# Altium PCB 1229-T1.PcbDoc
Units mm, origin at the board's own origin, x right, y up, seen from the top; angles counter-clockwise.
Board outline 28.78 x 9.58 mm, 4 copper layers (TopLayer, MidLayer1, MidLayer14, BottomLayer); 42 components, 33 nets, 118 pads, 49 vias.
Unrouted connection lines stored in the file: 24.
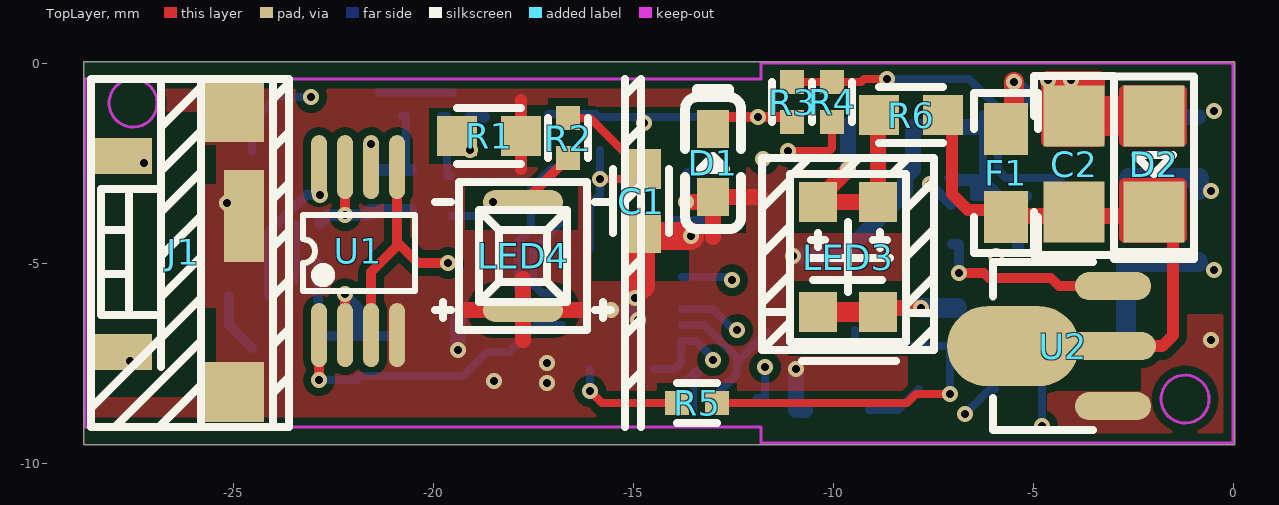
[diagram p0: TopLayer view]
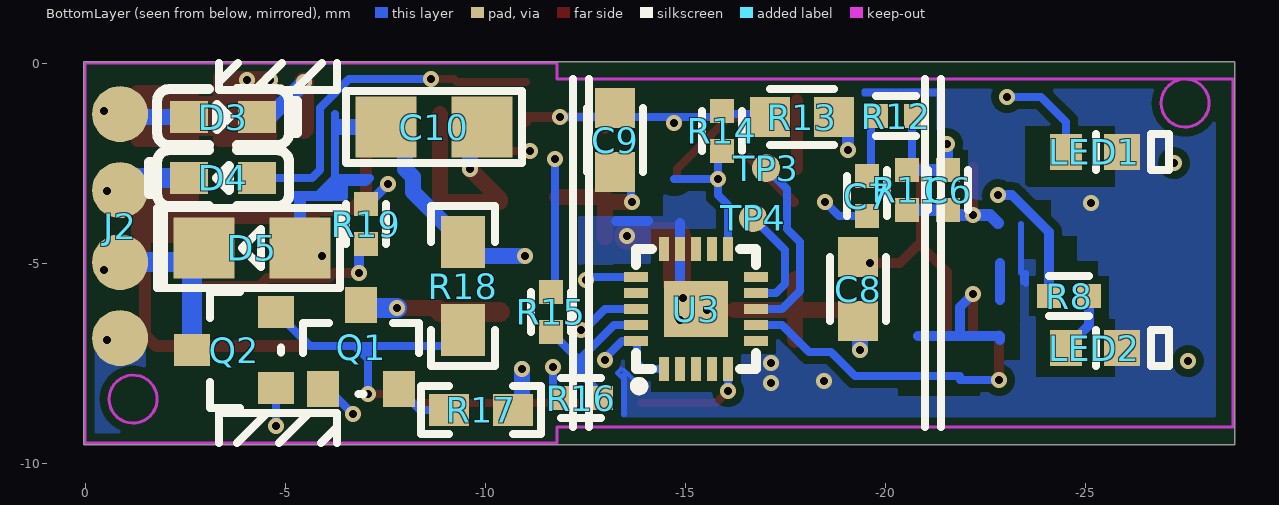
[diagram p1: BottomLayer view, seen from below]
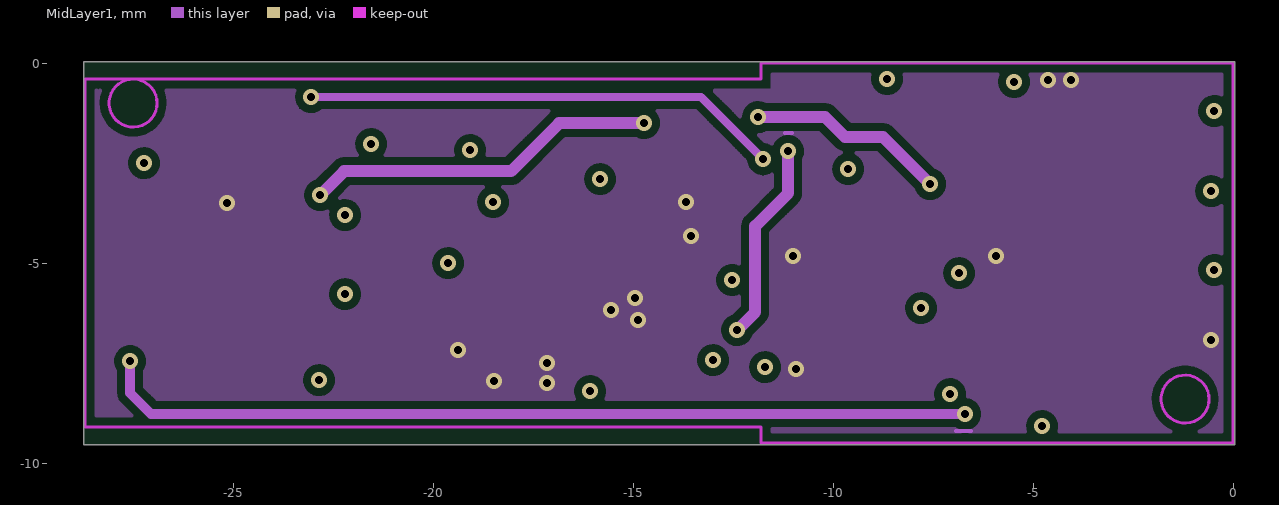
[diagram p2: MidLayer1]
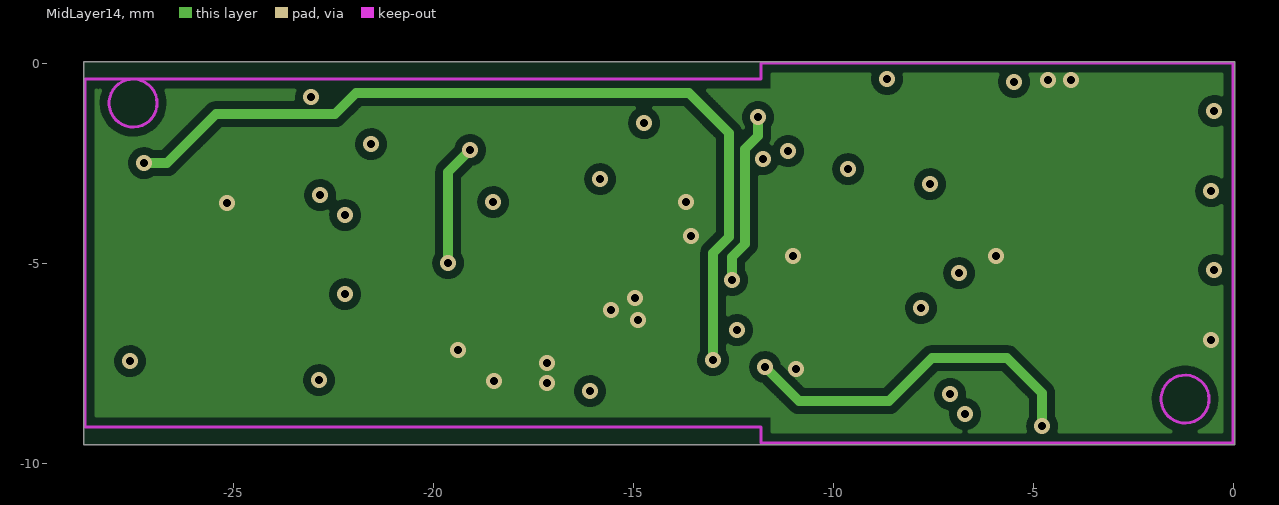
[diagram p3: MidLayer14]

## Layer stack, top to bottom
TopSolder: solder mask 0.0102, Solder Resist, Dk 3.5
TopLayer: signal copper 0.0356
Dielectric1: dielectric 0.32, FR-4, Dk 4.8
MidLayer1: signal copper 0.0356
Dielectric2: dielectric 0.32, FR-4, Dk 4.8
MidLayer14: signal copper 0.0356
Dielectric3: dielectric 0.32, FR-4, Dk 4.8
BottomLayer: signal copper 0.0356
BottomSolder: solder mask 0.0102, Solder Resist, Dk 3.5

## Board outline
-28.738,-9.538 0.038,-9.538 0.038,0.038 -28.738,0.038

## Design rules (kind name [scope] priority, off if disabled: settings)
Clearance [All] p1: gap=0.15 ignorepadtopadclearanceinfootprint=FALSE except(0: Arc-Hole Track-Hole SMDPad-Hole THPad-Hole Via-Hole Fill-Hole Poly-Hole Region-Hole Text-Hole)
ComponentClearance [All] p1 off: gap=0.254 collisioncheckmode=3 verticalgap=0.254 showdistances=FALSE
FabricationTestPointUsage TestPointUsage [All] p1: valid=0 allowmultiple=FALSE
FabricationTestpoint Testpoint [All] p1: side=3 testpointundercomponent=TRUE minsize=1.016 maxsize=2.54 preferedsize=1.524 minholesize=0.508 maxholesize=1.016 preferedholesize=0.813 testpointgrid=0.025 allowsidetop=TRUE allowsidebottom=TRUE usegrid=TRUE gridtolerance=0
PolygonConnect [All] p1: connectstyle=Relief reliefconductorwidth=0.254 reliefentries=4 polygonreliefangle="90 Angle" airgapwidth=0.254
RoutingLayers [All] p1: top layer_v5=TRUE mid layer 1_v5=FALSE mid layer 14_v5=FALSE bottom layer_v5=TRUE
RoutingVias [All] p1: holewidth=0.711 width=1.27 viastyle="Through Hole" minholewidth=0.711 minwidth=1.27 maxholewidth=0.711 maxwidth=1.27
SolderMaskExpansion [All] p1: expansion=0.051 istentingtop=FALSE
Width [All] p1: maxlimit=0.254 minlimit=0.254 preferedwidth=0.254
26 further rules are at their usual default settings.

## Components (designator, comment, footprint, x,y, rotation, side; value= is the part's Value field where it differs from the comment)
C1 "10uF" 0603#1 -14.8,-4.25 r90 top
C2 "2uF" 1206#1 -3.975,-3.725 r90 top
C6 "3.9PF" 0402#1 -21.575,-3.675 r90 bottom
C7 "470PF" 0402#1 -19.55,-3.825 r90 bottom
C8 "100nF" 0603#1 -19.325,-4.85 r270 bottom
C9 "10uF" 0603#1 -13.25,-1.125 r270 bottom
C10 "1uF" 1206#2 -7.525,-1.6 r0 bottom
D1 "C2" 0805#1 -13,-3.35 r0 top
D2 "CG" 1206#1 -1.975,-1.325 r270 top
D3 "W2" 0805#1 -2.6,-1.35 r270 bottom
D4 "W2" 0805#1 -4.3,-2.875 r90 bottom
D5 "CM" 1206#2 -5.375,-4.625 r180 bottom
F1 "V" 0805#2 -5.675,-3.85 r90 top
J1 "小板" SIP5P -24.975,-1.225 r0 top
J2 "" SIP4 -0.875,-6.875 r90 bottom
LED1 "红色LED" 0603V#1 -24.525,-2.225 r0 bottom
LED2 "黄色LED" 0603V#1 -24.525,-7.125 r0 bottom
LED3 "3528 红色LED" LED-SMD -8.875,-3.475 r0 top
LED4 "" LED2P -17.75,-6.175 r0 top
Q1 "AJR A" SOT-23#1 -5.95,-8.15 r0 bottom
Q2 "AJR" SOT-23#2 -4.775,-8.125 r90 bottom
R1 "10K/103" 0603#1 -19.4,-1.825 r0 top
R2 "412K" 0402#1 -16.625,-2.375 r90 top
R3 "10K" 0402#1 -11.025,-1.475 r90 top
R4 "665R" 0402#1 -10.025,-1.475 r90 top
R5 "4.7K" 0402#1 -12.9,-8.5 r180 top
R6 "10R/100" 0603#1 -8.85,-1.3 r0 top
R8 "2.2K" 0402#2 -24.1,-5.825 r0 bottom
R11 "420K" 0402#1 -20.55,-3.675 r90 bottom
R12 "10K" 0402#2 -19.775,-1.325 r0 bottom
R13 "10K" 0603#2 -18.725,-1.35 r180 bottom
R14 "10K" 0402#1 -15.925,-2.2 r90 bottom
R15 "4.7K" 0402#1 -11.65,-6.725 r90 bottom
R16 "2K" 0402#2 -11.9,-8.375 r0 bottom
R17 "5.6R/5R6" 0603V#2 -9.1,-8.675 r0 bottom
R18 "3.9R/3R9" 0805#2 -9.45,-6.675 r90 bottom
R19 "10R" 0402#1 -7.025,-4.525 r90 bottom
TP3 "" SIP1 -17.025,-2.625 r90 bottom
TP4 "" SIP1 -16.7,-3.875 r90 bottom
U1 "GS358" SOP-8A -22.85,-6.8 r0 top
U2 "7550-1" SOT89 -3,-5.575 r0 top
U3 "???" QFN20 -14.475,-7.65 r180 bottom

## Footprints (in the part's own frame and the unit in brackets; to place one, negate y for a bottom-side part, rotate by r counter-clockwise, add the part's x,y. Pads: shape width x height; smd on the part's side, far side on the other; paste and mask are expansions set on the pad)
0402#1 [mm]
  rect 0.6x0.6 smd: 1(0,0) 2(1,0)
  silkscreen extent 0,-0.5 1,0.5
0402#2 [mm]
  rect 0.6x0.6 smd: 1(0,0) 2(-1,0)
  silkscreen extent -1,-0.5 0,0.5
0603#1 [mm]
  rect 1x1 smd: 1(0,0) 2(1.6,0)
  silkscreen extent 0,-0.7 1.6,0.7
0603#2 [mm]
  rect 1x1 smd: 1(0,0) 2(-1.6,0)
  silkscreen extent -1.6,-0.7 0,0.7
0603V#1 [mm]
  rect 0.8x0.9 smd: 1(0,0)
  rect 0.9x0.9 smd: 2(-1.4,0)
  silkscreen extent -2.58,-0.45 -0.75,0.45
0603V#2 [mm]
  rect 1x0.8 smd: 1(0,0) 2(-1.6,0)
  silkscreen extent -2.3,-0.6 0.7,0.6
0805#1 [mm]
  rect 0.8x0.95 smd: 1(0,0) 2(0,1.7)
  silkscreen extent -0.7,-0.8 0.7,2.7
0805#2 [mm]
  rect 1.3x1.1 smd: 1(0,0) 2(2.2,0)
  silkscreen extent -0.9,-0.8 3.1,0.8
1206#1 [mil]
  rect 60x60 smd: 1(0,0) 2(94.49,0)
  silkscreen extent -42,-39 134,39
1206#2 [mil]
  rect 60x60 smd: 1(0,0) 2(-94.49,0)
  silkscreen extent -134,-35 39,35
LED2P [mm]
  oval 2x0.6 smd: 1(0,0) 2(0,2.7)
  silkscreen extent -2.2,-0.5 2.2,3.2
LED-SMD [mm]
  rect 0.95x1 smd: 1(0,0) 2(-1.5,0) 3(-1.5,-2.75) 4(0,-2.75)
  silkscreen extent -2.9,-3.98 1.4,1.1
QFN20 [mm]
  rect 0.25x0.6 smd: 1(0,0) 2(0.4,0) 3(0.8,0) 4(1.2,0) 5(1.6,0) 11(1.6,3) 12(1.2,3) 13(0.8,3) 14(0.4,3) 15(0,3)
  rect 0.6x0.25 smd: 6(2.3,0.7) 7(2.3,1.1) 8(2.3,1.5) 9(2.3,1.9) 10(2.3,2.3) 16(-0.7,2.3) 17(-0.7,1.9) 18(-0.7,1.5) 19(-0.7,1.1) 20(-0.7,0.7)
  rect 1.6x1.4 smd: 21(0.8,1.5)
  silkscreen extent -0.7,-0.5 2.3,3
SIP1 [mm]
  round 0.7 smd: 1(0,0)
SIP4 [mm]
  round 1.4 smd: 1(0,0) 2(1.9,0) 3(3.7,0) 4(5.6,0)
SIP5P [mm]
  rect 1.5x1.5 smd: 1(0,0) 3(0,-7)
  rect 1x2.3 smd: 2(0.25,-2.6)
  rect 1.5x0.9 smd: 4(-2.8,-1.1) 5(-2.8,-6)
  silkscreen extent -3.57,-7.88 1.38,0.82
SOP-8A [mm]
  oval 0.4x1.6 smd: 1(0,0) 2(0.65,0) 3(1.3,0) 4(1.95,0) 5(1.95,4.2) 6(1.3,4.2) 7(0.65,4.2) 8(0,4.2)
  silkscreen extent -0.4,1.1 2.4,3
SOT89 [mm]
  oval 3.3x2 smd: 0(-2.5,-1.5)
  oval 1.9x0.7 smd: 1(0,0) 3(0,-3)
  oval 2.54x0.7 smd: 2(-0.2,-1.5)
  silkscreen extent -3,-3.6 -0.5,0.6
SOT-23#1 [mm]
  rect 0.8x0.9 smd: 1(0,0) 2(-1.9,0) 3(-0.95,-2.1)
  silkscreen extent -2.4,-1.65 0.5,0.13
SOT-23#2 [mm]
  rect 0.8x0.9 smd: 1(0,0) 2(1.9,0) 3(0.95,2.1)
  silkscreen extent -0.5,-0.13 2.4,1.65

## Part data
C1 C2 C6 C7 C8 C9 C10: library part "CAP NP", Text Field1=20, Text Field2=10
D1 D2 D3 D4 D5: library part D1N3063_0, Text Field1=20, Text Field2=20
F1: library part FUSE_0, Text Field1=30, Text Field2=20
J1: library part "HEADER 10_0", Text Field1=30, Text Field2=40
J2: library part "HEADER 1_0", Text Field1=30, Text Field2=50
LED1 LED2 LED4: library part LED, Text Field1=40, Text Field2=20
LED3: library part "LED BI-COLOUR_0", Text Field1=60, Text Field2=40
Q1 Q2: library part Q2N2369_0, Text Field1=20, Text Field2=20
R1 R2 R3 R4 R5 R6 R8 R11 R12 R13 R14 R15 R16 R17 R18 R19: library part R, Text Field1=20, Text Field2=30
TP3 TP4: library part "T POINT R", Text Field1=10, Text Field2=20
U1: library part LM358
U2: library part 78XX/SM_1, Text Field1=70, Text Field2=30
U3: library part 20P

## Via types
v1: diameter 0.4, hole 0.2, TopLayer to BottomLayer, 49 vias

## Nets (pads, with @x,y where several pads share a name; then routed paths per layer and width w, separated by ;. In a path a pad name is that pad's centre, name@x,y a point inside that pad or via, vN(x,y) a via of type N, cw(c..) or ccw(c..) an arc to the next point about the centre after c; other vN are vias at no path point)
GND: C1.1 C2.2 C8.2 C9.2 C10.1 D1.1 D2.1 D5.1 J1.1 J1.2 J1.3 J2.1 LED1.2 LED2.2 LED4.1 R1.2 R17.2 R18.2 U1.4 U2.3 U3.14 | length 45.2
  TopLayer w0.3: -17.8,-2.65 -17.8,-0.925 ; C2.2@-4.65,-1.95 -3.35,-1.95 -3.35,-0.35 -4.65,-0.35 C2.2@-4.65,-1.95 ; D2.1@-2.7,-1.95 -1.3,-1.95 -1.3,-0.7 -2.7,-0.7 D2.1@-2.7,-1.95
  TopLayer w0.4: -19.175,-6.175 -16.225,-6.175 ; -17.75,-6.925 -17.75,-5.4 ; v1(-13.675,-3.475) -13,-3.475 -13,-4.35 D1.1 -11.8,-3.35
  TopLayer w1: C2.2@-4.2,-0.75 -4.2,-1.4 -3.825,-1.4 C2.2@-3.825,-0.8 ; C2.2@-3.95,-1.325 -1.75,-1.325 -1.75,-1.125 -1.75,-1.5 D2.1@-2.225,-1.5
  BottomLayer w0.2: v1@-13.65,-3.475 -13.65,-2.725 C9.2 ; -6.25,-2.875 -6.475,-2.875 -7.025,-2.875 -7.125,-2.875 -7.025,-2.975 -6.475,-2.975 -6.475,-3.175 -6.475,-3.35 -6.3,-3.35 -6.175,-3.35 -5.825,-3.35 -5.375,-3.35 -5.125,-3.35 -5.125,-3.3 -5.375,-3.3 -5.825,-3.3 -6.063,-3.062 -6.25,-2.875 ; -6.25,-2.875 -6.25,-1.6 ; -6.25,-2.875 -6.25,-1.6 ; -6.25,-1.6 -6.25,-1.275 -6.25,-1.6
  BottomLayer w0.3: D5.1 -5.375,-3.4
  BottomLayer w0.4: v1(-19.375,-7.175) C8.2@-19.375,-6.425 ; v1(-11,-4.825) -9.8,-4.825 -8.2,-3.225 -8.2,-2.85 -8,-2.65 -8,-1.6 C10.1@-7.55,-1.6 ; v1(-10.925,-7.65) -10.925,-8.675 R17.2 ; C10.1 -6.35,-1.6 ; -6.3,-3.025 -6.3,-3.175 -6.175,-3.175
  other v1: -0.55,-6.925 -5.925,-4.825 -25.15,-3.5 -4.625,-0.425 -4.05,-0.425
NetC4_1: U1.1
NetC4_2: U1.2 | length 4.4
  TopLayer w0.25: U1.2@-22.2,-6.825 v1@-22.2,-5.75
  BottomLayer w0.25: -22.875,-6.925 -22.875,-6.825 -20.825,-6.825 ; v1(-22.2,-5.775) -21.875,-6.1 -21.875,-6.825
NetC5_1: 
NetC5_2: C6.1 R11.1 U1.7 | length 3.7
  TopLayer w0.25: v1(-22.2,-3.8) U1.7
  BottomLayer w0.3: -22.825,-4 -22.625,-3.8 -21.575,-3.8 C6.1 R11.1
NetC6_2: C6.2 R11.2 R12.2 U1.6 | length 3.1
  BottomLayer w0.2: R12.2 -20.675,-1.325 R11.2@-20.675,-2.65
  BottomLayer w0.3: v1(-21.55,-2.025) -21.55,-2.675 R11.2
NetC7_1: C7.1 LED4.2 R2.1 | length 2.8
  TopLayer w0.25: LED4.2@-17.725,-3.475 R2.1
  BottomLayer w0.2: C7.1 -18.85,-3.825 v1(-18.5,-3.475)
NetC7_2: C7.2 R12.1 | length 1.7
  BottomLayer w0.2: R12.1@-19.8,-1.325 -19.65,-1.325 -19.65,-2.825 C7.2
NetC8_1: C8.1 R1.1 U1.3 U1.5
NetC10_2: C10.2 LED3.1 LED3.2 R6.1 | length 5.9
  TopLayer w0.4: v1(-9.625,-2.65) -10.375,-3.4 LED3.2 LED3.1 R6.1@-8.875,-1.275
  BottomLayer w0.4: v1(-9.625,-2.65) C10.2@-9.625,-1.551
NetD3_1: D3.1 J2.4 | length 1.7
  BottomLayer w0.4: D3.1 J2.4@-0.875,-1.35
  other v1: -0.475,-1.2
NetD3_2: D3.2 F1.2 | length 2.7
  TopLayer w0.5: F1.2@-5.475,-1.65 v1(-5.475,-0.475)
  BottomLayer w0.4: v1(-5.475,-0.475) -4.6,-1.35 D3.2@-4.275,-1.35
NetD4_1: D4.1 R3.2 R4.2 | length 8.7
  TopLayer w0.2: R3.2 -9.3,-0.475 -9.225,-0.4 v1(-8.65,-0.4)
  BottomLayer w0.2: v1(-8.65,-0.4) -6.6,-0.4 -5.875,-1.125 -5.875,-2.675 -5.675,-2.875 D4.1
NetD4_2: D4.2 J2.3 | length 2
  BottomLayer w0.5: D4.2 -0.85,-2.875 J2.3@-0.85,-3.175
  other v1: -0.55,-3.2
NetD5_2: D5.2 J2.2 Q2.3 | length 4
  BottomLayer w0.5: Q2.3 -2.675,-4.975 J2.2
  other v1: -0.475,-5.175
NetJ1_4: J1.4 U3.1 U3.20 | length 23.9
  MidLayer14 w0.25: v1(-27.225,-2.5) -26.65,-2.5 -25.425,-1.275 -22.45,-1.275 -21.925,-0.75 -13.6,-0.75 -12.6,-1.75 -12.6,-4.35 -13,-4.75 v1(-13,-7.425)
  BottomLayer w0.2: U3.1 -13.95,-7.65 -13.8,-7.5 -13.8,-6.95 -13.425,-6.95 -13,-7.375 v1(-13,-7.425)
NetJ1_5: J1.5 Q1.1 | length 22.9
  MidLayer1 w0.25: v1(-27.575,-7.45) -27.575,-8.25 -27.05,-8.775 v1(-6.7,-8.775)
  BottomLayer w0.2: v1(-6.7,-8.775) -6.075,-8.15 Q1.1
NetLED1_1: LED1.1 R15.2 | length 17.8
  MidLayer1 w0.2: v1(-23.05,-0.85) -13.3,-0.85 v1(-11.75,-2.4)
  BottomLayer w0.2: LED1.1 -24.525,-1.475 -23.9,-0.85 v1(-23.05,-0.85) ; R15.2@-11.75,-5.725 v1(-11.75,-2.4)
NetLED2_1: LED2.1 R8.2 | length 1.5
  BottomLayer w0.25: R8.2 -25.1,-6.55 LED2.1
NetLED3_3: LED3.3 LED3.4 Q1.3 | length 3.6
  TopLayer w0.4: LED3.4 -8.875,-6.125 v1(-7.8,-6.125)
  TopLayer w0.5: LED3.3 LED3.4
  BottomLayer w0.5: v1(-7.8,-6.125) Q1.3@-6.9,-6.125
NetQ1_2: Q1.2 R17.1 | length 1.5
  BottomLayer w0.2: R17.1 -8.375,-8.675 Q1.2
NetQ2_1: Q2.1 R16.1 | length 10.8
  MidLayer14 w0.25: v1(-11.7,-7.6) -10.85,-8.45 -8.6,-8.45 -7.525,-7.375 -5.65,-7.375 -4.775,-8.25 v1(-4.775,-9.075)
  BottomLayer w0.2: R16.1 -11.7,-8.375 v1(-11.7,-7.6) ; v1(-4.775,-9.075) Q2.1
NetQ2_2: Q2.2 R5.1 R18.1 | length 13.2
  TopLayer w0.2: R5.1 -8.15,-8.5 -7.925,-8.275 v1(-7.075,-8.275)
  BottomLayer w0.2: R18.1 -9.45,-7.075 -7.075,-7.075 -6.8,-7.075 -5.625,-7.075 Q2.2 ; v1@-7.075,-8.25 -7.075,-7.4 ; -6.8,-7.125 -7.075,-7.4 ; -7.075,-7.4 -7.075,-7.1 -7.075,-7.4
NetR4_1: R4.1 U3.18 | length 8.4
  TopLayer w0.2: v1(-11.125,-2.2) -10.1,-2.2 -10.025,-2.125 R4.1
  MidLayer1 w0.3: v1(-12.4,-6.675) -11.95,-6.225 -11.95,-4.075 -11.125,-3.25 v1(-11.125,-2.2)
  BottomLayer w0.2: U3.18 -13,-6.15 -12.475,-6.675 v1(-12.4,-6.675)
NetR5_2: R5.2 U3.5 | length 2.8
  TopLayer w0.2: v1(-16.075,-8.2) -15.775,-8.5 R5.2
  BottomLayer w0.2: v1(-16.075,-8.2) U3.5
NetR15_1: R15.1 R16.2 U3.19 | length 3.9
  BottomLayer w0.2: U3.19 -13.225,-6.55 -12.4,-7.375 -12.4,-7.775 -12.9,-8.275 R16.2 ; -12.375,-7.45 R15.1
NetR19_1: R19.1 U2.1 | length 4.9
  TopLayer w0.25: v1@-6.825,-5.25 -6.225,-5.25 -6.1,-5.375 -4.55,-5.375 -4.35,-5.575 U2.1
  BottomLayer w0.25: R19.1 -6.85,-4.525 v1(-6.85,-5.25)
NetR?_1: 
NetTP3_1: TP3.1 U3.8 | length 4.7
  BottomLayer w0.2: TP3.1 -17.55,-3.15 -17.55,-4.15 -17.875,-4.475 -17.875,-5.7 -17.425,-6.15 U3.8
NetTP4_1: TP4.1 U3.9 | length 2.8
  BottomLayer w0.2: U3.9 -17.275,-5.75 -17.5,-5.525 -17.5,-4.675 TP4.1
U3_11: C1.2 R2.2 R14.1 U3.11 | length 7.3
  TopLayer w0.2: R2.2 -16.075,-1.375 C1.2 -14.8,-2.9 v1@-15.8,-2.9
  BottomLayer w0.2: U3.11 -16.075,-3.55 -15.825,-3.3 R14.1@-15.825,-2.175 ; v1@-15.8,-2.9 -14.725,-2.9
  other v1: -15.825,-2.9
V1: C2.1 D2.2 F1.1 R6.2 U2.2
VCC: C9.1 D1.2 R3.1 R8.1 R13.1 R13.2 R14.2 R19.2 U1.8 U3.16 | length 31.2
  TopLayer w0.25: D1.2 -13,-1.35 -11.025,-1.35 R3.1
  MidLayer1 w0.3: v1(-22.825,-3.3) -22.225,-2.7 -18.05,-2.7 -16.85,-1.5 v1(-14.725,-1.5) ; v1(-11.875,-1.35) -10.2,-1.35 -9.7,-1.85 -8.75,-1.85 v1(-7.575,-3.025)
  MidLayer14 w0.25: v1(-12.525,-5.425) -12.525,-4.85 -12.2,-4.525 -12.2,-2.15 -11.875,-1.825 v1(-11.875,-1.35)
  BottomLayer w0.2: R13.2@-17.125,-1.275 -15.925,-1.275 -15.925,-1.35 -14.725,-1.35 v1(-11.875,-1.35) ; U3.16 -12.525,-5.35 v1(-12.525,-5.425)
  BottomLayer w0.25: R8.1 -24.1,-4.225 -23.175,-3.3 v1(-22.825,-3.3) ; v1(-7.575,-3.025) R19.2@-7.05,-3.55
pads on no net: U2.0 U3.2 U3.3 U3.4 U3.6 U3.7 U3.10 U3.12 U3.13 U3.15 U3.17 U3.21
copper on no net: | length 52.8
  TopLayer w0.25: v1@-22.85,-7.95 -22.85,-6.8 ; -21.55,-6.8 -21.55,-5.225 -20.9,-4.575 -20.9,-2.575 ; -20.875,-4.5 -20.375,-5 v1(-19.625,-5)
  TopLayer w0.3: -7.25,-1.325 -7.025,-1.325 -7.025,-3.275 -6.625,-3.675 -5.675,-3.675 -5.675,-3.825 ; -5.475,-7.075 -1.775,-7.075 -1.5,-6.8 -1.5,-4.35 -2.7,-4.35 -2.7,-3.025 -1.3,-3.025 -1.3,-4.35 -1.625,-4.35
  TopLayer w0.4: -5.675,-3.825 -2.775,-3.825
  TopLayer w0.7: -14.8,-5.55 -14.8,-4.325 v1@-13.575,-4.325
  TopLayer w1: -2.25,-3.45 -2.25,-3.875 -1.775,-3.875 -1.775,-3.45
  MidLayer1 w0.1: -11.2,-1.75 -11.025,-1.75 ; -6.925,-9.2 -6.55,-9.2
  MidLayer14 w0.25: v1@-19.625,-4.975 -19.625,-2.725 v1(-19.075,-2.175)
  BottomLayer w0.1: -13.775,-7.975 -13.475,-7.675 ; -13.45,-7.9 -13.3,-7.75 -13.4,-7.65
  BottomLayer w0.125: -21.4,-0.7 -19.475,-0.7 -19.475,-0.775 -21.375,-0.775
  BottomLayer w0.15: -23.525,-5.525 -23.525,-5.25 ; -23.45,-5.475 -23.45,-5.25 ; -23.4,-5.225 -23.4,-4.025 ; -13.475,-8.775 -13.475,-7.8
  BottomLayer w0.2: v1@-22.825,-7.925 -21.875,-7.925 -21.875,-7.825 -19.25,-7.825 -18.65,-7.225 -18.1,-7.225 -17.425,-6.55 -16.775,-6.55
  BottomLayer w0.25: -22.875,-5.925 -22.875,-5 ; -15.25,-6.15 -14.875,-6.15 -14.875,-4 ; -14.075,-3.95 -13.275,-3.95
  BottomLayer w0.3: v1(-19.075,-2.175) -19.075,-1.35 -18.725,-1.35
  other v1: -17.15,-8 -18.475,-7.95 -22.85,-7.925 -17.15,-7.5 -14.875,-6.425 -15.55,-6.175 -14.95,-5.875 -13.55,-4.325

## Polygon pours and split planes (outlines as drawn)
no net on TopLayer "TopLayer-UnNamedNet1 1" (hatched 90Degree grid 0.064 track 0.102, remove dead copper, pour order 1001): -28.7,-9.5 -28.7,-8.4 -25.925,-8.4 -25.675,-8.15 -25.675,-7.525 -25.375,-7.525 -25.375,-6.075 -25.675,-6.075 -25.675,-3.075 -25.375,-3.075 -25.375,-2 -25.675,-2 -25.675,-1.175 -27,-1.175 -27,-0.4 -13.575,-0.4 -13.575,-1.3 -8.175,-1.3 -8.175,-9.1 -28.7,-9.1
no net on TopLayer "TopLayer-UnNamedNet1" (hatched 90Degree grid 0.064 track 0.102, remove dead copper, pour order 1000): -4.6,-7.15 -4.6,-9.5 -0.025,-9.5 -0.025,-6.325 -1.525,-6.325 -1.525,-6.8 -1.775,-7.05 -4.6,-7.05
no net on MidLayer1 "MidLayer1-UnNamedNet1" (hatched 90Degree grid 0.064 track 0.102, remove dead copper, pour order 1002): -28.425,-0.4 -28.425,-9.1 -11.8,-9.1 -11.8,-9.5 0,-9.5 0,0 -11.8,0 -11.8,-0.4
no net on MidLayer14 "MidLayer14-UnNamedNet1" (hatched 90Degree grid 0.064 track 0.102, remove dead copper, pour order 1003): -28.425,-0.45 -28.425,-9.1 -11.8,-9.1 -11.8,-9.5 0,-9.5 0,0 -11.8,0 -11.8,-0.4 -28.425,-0.4
no net on BottomLayer "BottomLayer-UnNamedNet1" (hatched 90Degree grid 0.064 track 0.102, remove dead copper, pour order 1004): -28.225,-9.075 -28.225,-0.425 -19.45,-0.425 -19.45,-1.175 -20.875,-1.175 -20.875,-2.65 -21.825,-2.65 -21.825,-3.975 -23.025,-3.975 -23.025,-7.9 -19.275,-7.9 -18.625,-7.25 -18.075,-7.25 -16.075,-5.25 -16.075,-2.925 -14.5,-2.925 -14.5,-3.875 -12.375,-3.875 -12.375,-9.1 -28.225,-9.1
no net on BottomLayer "BottomLayer-UnNamedNet1 1" (hatched 90Degree grid 0.064 track 0.102, remove dead copper, pour order 1005): -1.475,-9.475 -1.475,-6.8 -0.025,-6.8 -0.025,-9.5 -1.45,-9.5

## Keep-outs
KeepOutLayer:
  circle w0.076: c-27.5,-1 r0.6
  circle w0.076: c-1.2,-8.4 r0.6
  lines w0.076: -28.7,-9.1 -11.8,-9.1 -11.8,-9.5 0,-9.5 0,0 -11.8,0 -11.8,-0.4 -28.7,-0.4 -28.7,-9.1

## Silkscreen, mask and mechanical layers (free items; w line width, h text height)
TopOverlay:
  lines w0.2: -15.2,-9.1 -15.2,-0.4 ; -15.2,-8.125 -14.8,-7.725 ; -15.2,-6.8 -14.8,-6.4 ; -15.2,-5.3 -14.825,-4.925 ; -15.2,-3.45 -14.825,-3.075 ; -15.2,-2.025 -14.8,-1.625 ; -15.2,-0.8 -14.8,-0.4 -14.8,-9.1
BottomOverlay:
  lines w0.2: -21.4,-9.1 -21.4,-0.4 ; -21,-9.1 -21,-0.4 ; -12.6,-9.1 -12.6,-0.4 ; -12.2,-9.1 -12.2,-0.4 ; -6.3,-9.5 -6.3,-8.75 -3.35,-8.75 -3.35,-9.5 ; -6.3,-9.1 -5.9,-9.5 ; -6.3,0 -6.3,-0.675 -3.35,-0.675 -3.35,0 ; -5.925,0 -5.25,-0.675 ; -5.6,-8.75 -4.85,-9.5 ; -4.925,0 -4.25,-0.675 ; -4.55,-8.75 -3.8,-9.5 ; -3.825,0 -3.35,-0.475